# EAGLE board PCB design 2layer (EAGLE 7.5.0)
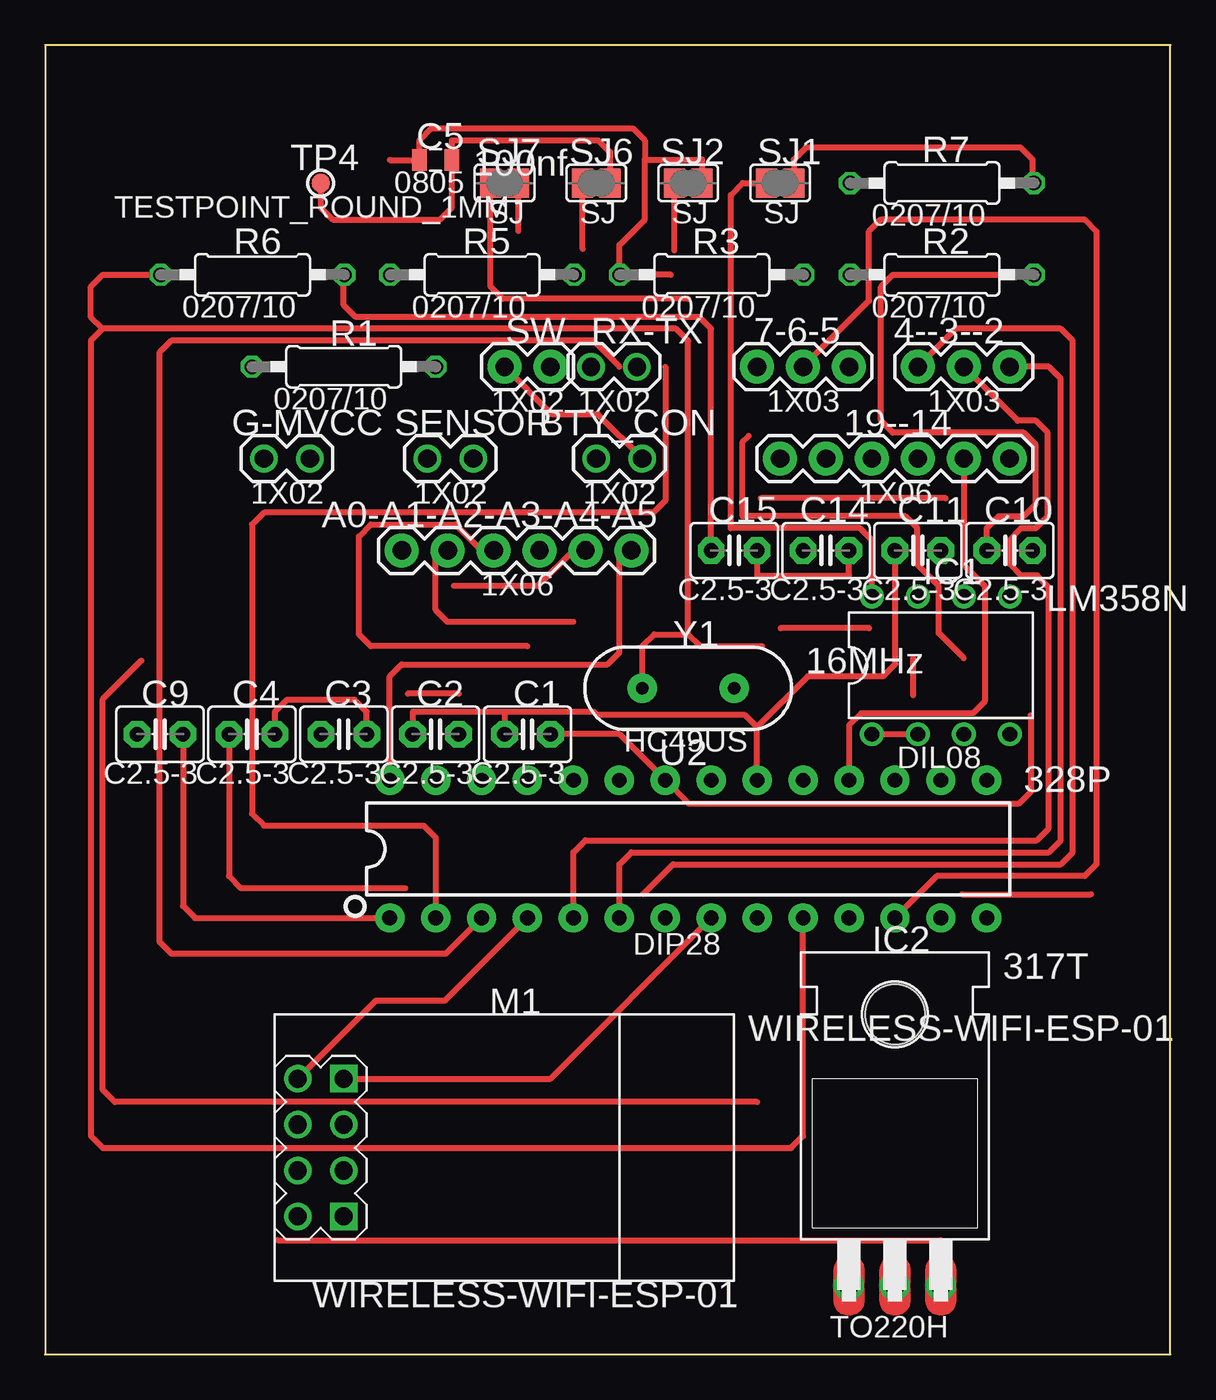
[diagram p0: board, top side]
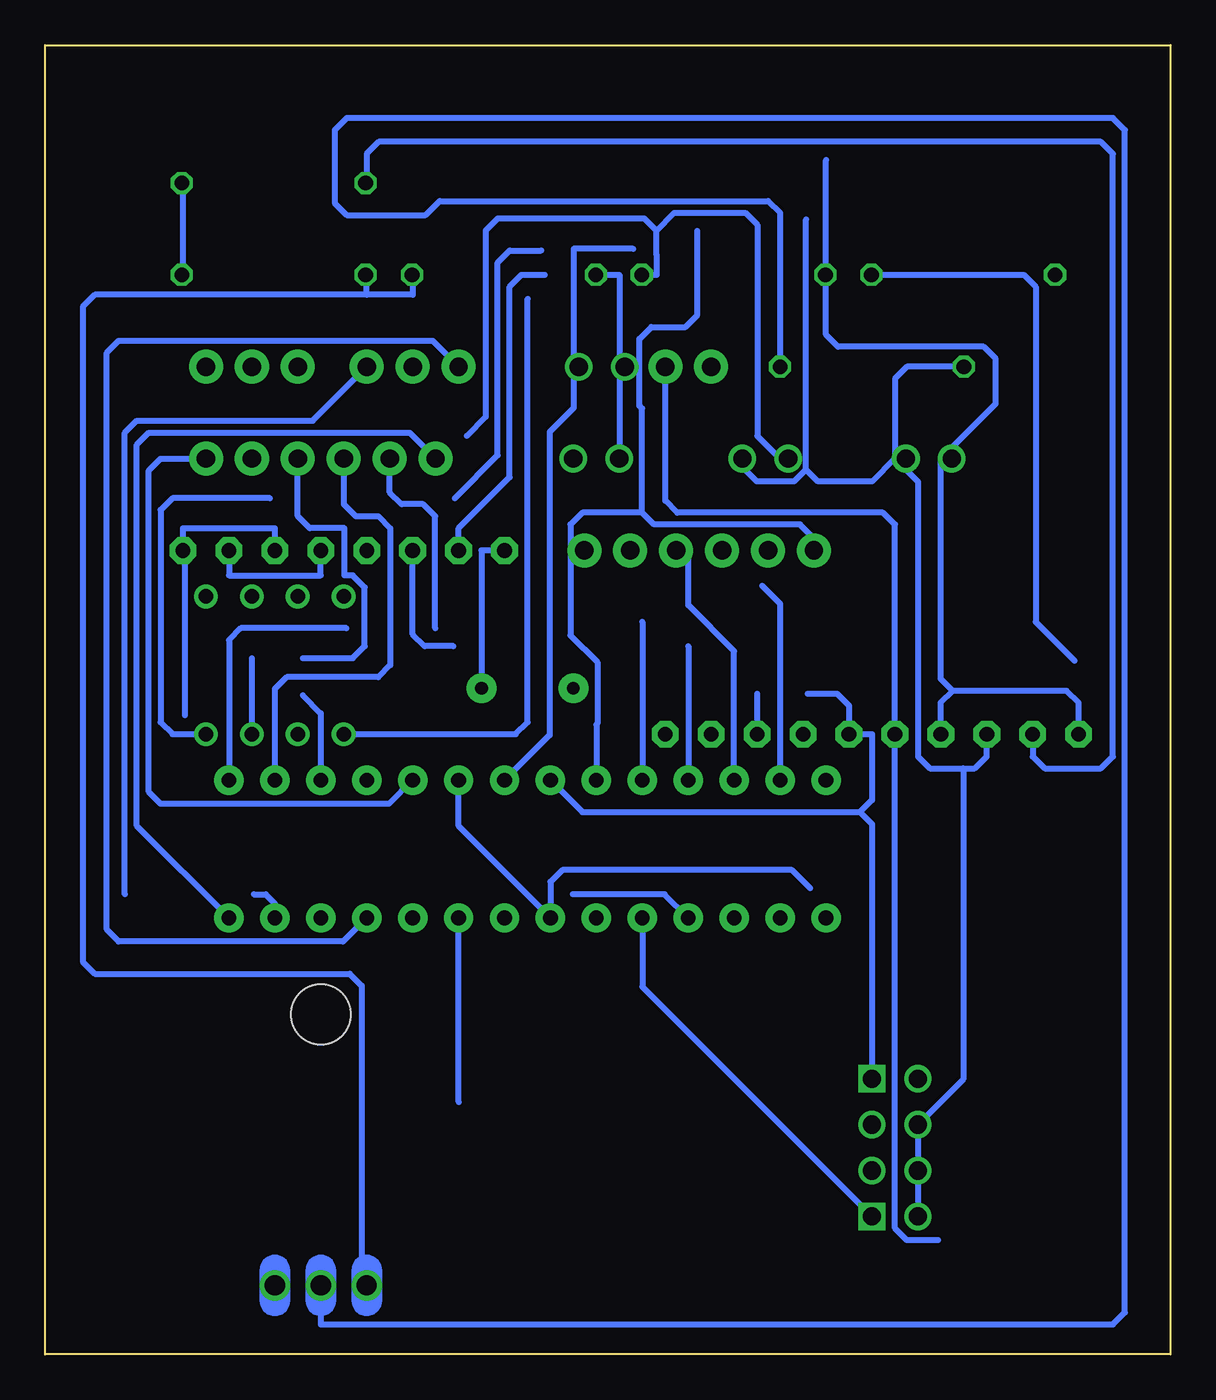
[diagram p1: board, bottom side, seen from below]

Size 62.23 x 72.39 mm. Coordinates in mm from the lower left corner, seen from the top.
Outline: 0,72.39 0,0 62.23,0 62.23,72.39 0,72.39
Copper layers (1*16): Top 0.035mm / dielectric 1.5mm / Bottom 0.035mm
Design rules "default *": minimum track width 10mil, minimum drill 0.61mm, track to track 8mil, track to pad 8mil, pad to pad 8mil, via to via 8mil, smd to smd 8mil, copper to edge 40mil, drill to drill 8mil, minimum pad ring 0mil, minimum via ring 8mil, stop-mask expansion 2mil, vias tented up to drill 19mil, thermal gap 10mil
Net classes: 0 Default: width 0.33 mm, clearance 0.33 mm

## Footprints (pad centres in the part's own frame; a part is rotated, then mirrored left to right if it is on the bottom)
1X03 = drill 1.016 pad 1.88: 1 -2.314,-1.128; 2 0.226,-1.128; 3 2.766,-1.128
1X06 = drill 1.016 pad 1.88: 1 -6.128,-1.128; 2 -3.588,-1.128; 3 -1.048,-1.128; 4 1.492,-1.128; 5 4.032,-1.128; 6 6.572,-1.128
1X02 = drill 1.016 pad 1.524: 1 -2.909,-1.128; 2 -0.369,-1.128
C2.5-3 = drill 0.813 pad 1.478 octagon: 1 -1.27,-0.992; 2 1.27,-0.992
0805 = smd 0.8 x 1.2: 1 -0.839,0.247; 2 0.961,0.247
DIL08 = drill 0.813 pad 1.321: 1 -2.818,-3.81; 2 -0.278,-3.81; 3 2.262,-3.81; 4 4.802,-3.81; 5 4.802,3.81; 6 2.262,3.81; 7 -0.278,3.81; 8 -2.818,3.81
TO220H = drill 1.118 pad 1.676: 1 -2.509,-8.317; 2 0.031,-8.317; 3 2.571,-8.317 | hole 3.302: 0.031,6.669
WIRELESS-WIFI-ESP-01 = drill 1 pad 1.508 square: A1 -8.89,3.742; D1 -8.89,-3.878 | drill 1 pad 1.508: A2 -11.43,3.742; B1 -8.89,1.202; B2 -11.43,1.202; C1 -8.89,-1.338; C2 -11.43,-1.338; D2 -11.43,-3.878
0207/10 = drill 0.813 pad 1.22 octagon: 1 -5.048,-1.055; 2 5.112,-1.055
SJ = smd 1.168 x 1.6: 1 -0.635,-0.928; 2 0.889,-0.928
1X02_SW = drill 1.016 pad 1.88: 1 -1.044,-1.128; 2 1.496,-1.128
TESTPOINT_ROUND_1MM = smd 0.996 x 0.996: P$1 -1.27,-0.014
DIP28 = drill 0.813 pad 1.626: 1 -16.629,-3.81; 2 -14.089,-3.81; 3 -11.549,-3.81; 4 -9.009,-3.81; 5 -6.469,-3.81; 6 -3.929,-3.81; 7 -1.389,-3.81; 8 1.151,-3.81; 9 3.691,-3.81; 10 6.231,-3.81; 11 8.771,-3.81; 12 11.311,-3.81; 13 13.851,-3.81; 14 16.391,-3.81; 15 16.391,3.81; 16 13.851,3.81; 17 11.311,3.81; 18 8.771,3.81; 19 6.231,3.81; 20 3.691,3.81; 21 1.151,3.81; 22 -1.389,3.81; 23 -3.929,3.81; 24 -6.469,3.81; 25 -9.009,3.81; 26 -11.549,3.81; 27 -14.089,3.81; 28 -16.629,3.81
HC49US = drill 0.7 pad 1.651: 1 -2.54,-0.046; 2 2.54,-0.046

## Placement (x,y rotation side)
4--3--2  1X03  [1X03]  50.57,55.74 0 top
7-6-5  1X03  [1X03]  41.68,55.74 0 top
19--14  1X06  [1X06]  46.77,50.66 0 top
A0-A1-A2-A3-A4-A5  1X06  [1X06]  25.85,45.58 0 top
BTY_CON  1X02  [1X02]  33.39,50.66 0 top
C1  C2.5-3  [C2.5-3]  26.67,35.28 0 top
C2  C2.5-3  [C2.5-3]  21.59,35.28 0 top
C3  C2.5-3  [C2.5-3]  16.51,35.28 0 top
C4  C2.5-3  [C2.5-3]  11.43,35.28 0 top
C5  100nf  [0805]  21.53,65.79 0 top
C9  C2.5-3  [C2.5-3]  6.35,35.28 0 top
C10  C2.5-3  [C2.5-3]  53.34,45.44 0 top
C11  C2.5-3  [C2.5-3]  48.26,45.44 0 top
C14  C2.5-3  [C2.5-3]  43.18,45.44 0 top
C15  C2.5-3  [C2.5-3]  38.1,45.44 0 top
G-MVCC  1X02  [1X02]  15,50.66 0 top
IC1  LM358N  [DIL08]  48.54,38.1 0 top
IC2  317T  [TO220H]  46.96,12.13 0 top
M1  WIRELESS-WIFI-ESP-01  [WIRELESS-WIFI-ESP-01]  25.4,11.5 0 top
R1  0207/10  [0207/10]  16.48,55.67 0 top
R2  0207/10  [0207/10]  49.56,60.75 0 top
R3  0207/10  [0207/10]  36.83,60.75 0 top
R5  0207/10  [0207/10]  24.13,60.75 0 top
R6  0207/10  [0207/10]  11.43,60.75 0 top
R7  0207/10  [0207/10]  49.56,65.83 0 top
RX-TX  1X02  [1X02]  33.09,55.74 0 top
SENSOR  1X02  [1X02]  24.04,50.66 0 top
SJ1  SJ  [SJ]  40.51,65.7 0 top
SJ2  SJ  [SJ]  35.43,65.7 0 top
SJ6  SJ  [SJ]  30.35,65.7 0 top
SJ7  SJ  [SJ]  25.27,65.7 0 top
SW  1X02  [1X02_SW]  26.44,55.74 0 top
TP4  TESTPOINT_ROUND_1MM  [TESTPOINT_ROUND_1MM]  16.51,64.78 0 top
U2  328P  [DIP28]  35.68,27.94 0 top
Y1  16MHz  [HC49US]  35.56,36.88 0 top

## Library data of the parts
4--3--2 7-6-5 19--14 A0-A1-A2-A3-A4-A5 BTY_CON C1-C5 C9-C11 C14 C15 G-MVCC IC1 IC2 M1 R1-R3 R5-R7 RX-TX SENSOR SJ1 SJ2 SJ6 SJ7 SW TP4 U2 Y1 = common

## Nets
0/RX: RX-TX.2 U2.2
1/TX: RX-TX.1 U2.3
2: 4--3--2.1 M1.A2 U2.4
3: 4--3--2.2 M1.D1 U2.5
4: 4--3--2.3 U2.6
5/B: 7-6-5.1 U2.11
6: 7-6-5.2 U2.12
7/C: 7-6-5.3 U2.13
8: 19--14.1 U2.14
9/A: 19--14.2 U2.15
10/SS: 19--14.3 U2.16
11/MOSI: 19--14.4 U2.17
12/MISO: 19--14.5 U2.18
13/SCK: 19--14.6 U2.19
A0: A0-A1-A2-A3-A4-A5.1 SJ7.2 U2.23
A1: A0-A1-A2-A3-A4-A5.2 U2.24
A2/TEM: A0-A1-A2-A3-A4-A5.3 U2.25
A3: A0-A1-A2-A3-A4-A5.4 U2.26
A4/SDA: A0-A1-A2-A3-A4-A5.5 U2.27
A5/SCL: A0-A1-A2-A3-A4-A5.6 U2.28
GND: BTY_CON.1 C1.2 C2.2 C3.2 C4.2 C5.1 C9.1 C10.2 C11.2 C14.2 C15.2 G-MVCC.1 M1.A1 R3.1 R5.1 SJ2.2 U2.8 U2.22
M_VCC: C1.1 C2.1 C4.1 C5.2 C10.1 C11.1 G-MVCC.2 M1.B2 M1.C2 M1.D2 R1.1 R2.2 R7.2 SENSOR.2 SJ1.2 SJ6.2 TP4.P$1 U2.7 U2.20
N$1: BTY_CON.2 SW.1
N$2: IC1.3 R5.2 SENSOR.1
N$3: IC2.2 R1.2
N$6: IC2.1 R2.1 R3.2
N$12: C9.2 R7.1 U2.1
N$14: SJ6.1 U2.21
N$19: IC1.1 IC1.2 SJ7.1
N$28: C15.1 R6.2 U2.9 Y1.2
N$29: C14.1 R6.1 U2.10 Y1.1
V+: IC1.8 SJ1.1
V-: IC1.4 SJ2.1
VBAT: C3.1 IC2.3 SW.2

## Tracks (layer width: path | path; a pad name or v marks a point on that pad's centre or on a via)
0/RX
  Top 0.33: 34.29,54.61 34.29,47.21 33.63,46.55 12.1,46.55 11.44,45.89 11.44,29.89 12.1,29.23 20.93,29.23 21.59,28.57 U2.2
1/TX
  Top 0.33: 31.75,54.61 30.31,56.05 6.97,56.05 6.31,55.39 6.31,22.82 6.97,22.16 22.16,22.16 U2.3
2
  Top 0.33: U2.4 22.09,19.55 18.28,19.55 M1.A2 | 33.06,25.44 34.72,27.1 56.16,27.1 56.82,27.76 56.82,56.05 56.16,56.71 50.35,56.71 4--3--2.1
  Bottom 0.33: U2.4 27.98,25.44 33.06,25.44
3
  Top 0.33: U2.5 29.21,27.76 29.87,28.42 54.84,28.42 55.5,29.08 55.5,42.41 54.84,43.07 53.96,43.07 53.3,43.73 53.3,45.02 53.96,45.68 54.77,45.68 55.44,46.34 55.44,50.97 54.77,51.62 53.78,51.62 4--3--2.2
  Bottom 0.33: U2.5 29.21,20.32 M1.D1
4
  Top 0.33: U2.6 31.75,27.1 32.41,27.76 55.5,27.76 56.16,28.42 56.16,53.95 55.5,54.61 4--3--2.3
5/B
  Bottom 0.33: U2.11 45.76,22.82 58.17,22.82 58.83,23.48 58.83,55.39 58.17,56.05 40.8,56.05 7-6-5.1
6
  Top 0.33: 7-6-5.2 45.55,58.26 45.55,62.1 46.22,62.76 57.48,62.76 58.14,62.1 58.14,27.1 57.48,26.44 49.3,26.44 U2.12
7/C
  Top 0.33: 50.7,25.44 57.82,25.44
  Bottom 0.33: 57.82,25.44 57.82,50.97 57.16,51.62 47.44,51.62 7-6-5.3 | 50.7,25.44 50.04,25.44 49.53,24.93 U2.13 | U2.13
8
  Bottom 0.33: U2.14 57.16,29.22 57.16,50.3 56.5,50.97 42.08,50.97 19--14.1
9/A
  Top 0.33: 45.57,40.16 40.67,40.16
  Bottom 0.33: 40.67,40.16 40.67,46.34 41.33,47 42.52,47 43.18,47.66 19--14.2 | 45.57,40.16 51.41,40.16 52.07,39.5 U2.15
10/SS
  Bottom 0.33: 19--14.3 45.72,47 45.06,46.34 43.8,46.34 43.14,45.68 43.14,38.11 43.8,37.45 48.87,37.45 49.53,36.79 U2.16
11/MOSI
  Top 0.33: 47.99,38.49 47.99,36.45
  Bottom 0.33: 47.99,36.45 46.99,35.45 U2.17 | 47.99,38.49 45.22,38.49 44.56,39.15 44.56,42.41 45.22,43.07 45.68,43.07 45.68,45.68 47.6,45.68 48.26,46.34 19--14.4
12/MISO
  Top 0.33: 19--14.5 50.8,43.64 51.95,42.49 51.95,36.11 51.3,35.45 45.11,35.45 44.45,34.79 U2.18
13/SCK
  Bottom 0.33: U2.19 43.22,30.44 55.84,30.44 56.5,31.1 56.5,48.87 55.84,49.53 19--14.6
A0
  Top 0.33: 26.16,62.12 SJ7.2
  Bottom 0.33: 19.05,44.45 20.48,45.89 28.56,45.89 29.22,46.55 | 29.22,46.55 32.52,46.55 33.18,45.89 33.18,39.76 31.7,38.27 31.7,34.88 31.75,34.82 U2.23 | 29.22,46.55 29.22,52.31 29.38,52.46 29.38,56.15 28.71,56.81 26.82,56.81 26.16,57.47 26.16,62.12
A1
  Top 0.33: 29.21,40.5 22.25,40.5 21.59,41.16 21.59,44.45
  Bottom 0.33: 29.21,40.5 U2.24
A2/TEM
  Top 0.33: 26.67,39.15 18.01,39.15 17.35,39.81 17.35,45.23 18.01,45.89 22.7,45.89 24.13,44.45
  Bottom 0.33: 26.67,39.15 U2.25
A3
  Bottom 0.33: U2.26 24.13,38.89 26.67,41.43 26.67,44.45
A4/SDA
  Top 0.33: 22.59,42.51 27.27,42.51 29.21,44.45
  Bottom 0.33: 22.59,42.51 21.59,41.5 U2.27
A5/SCL
  Top 0.33: U2.28 19.05,37.49 19.71,38.15 31.09,38.15 31.75,38.81 31.75,44.45
GND
  Top 0.33: M1.A1 27.94,15.24 U2.8 | 54.49,35.35 54.49,31.1 53.84,30.44 35.6,30.44 U2.22 31.75,34.29 C1.2 | 19.05,66.04 C5.1 20.69,67.13 21.35,67.8 32.5,67.8 33.16,67.13 33.16,66.06 | C3.2 17.78,35.52 17.12,36.18 13.36,36.18 12.7,35.52 C4.2 | C15.2 39.37,43.07 44.45,43.07 C14.2 | 34.59,59.69 31.75,59.69 31.75,61.34 33.16,62.74 33.16,66.06 | 22.86,36.53 20.05,36.53 | 33.16,66.06 36.32,66.06 SJ2.2
  Bottom 0.33: C9.1 5.08,36.03 5.74,36.69 12.04,36.69 | 12.04,36.69 12.7,37.35 12.7,49.53 9.66,52.57 9.66,55.05 10.32,55.72 18.39,55.72 19.05,56.38 19.05,59.69 19.05,66.04 | 31.75,59.69 30.48,59.69 BTY_CON.1 | 20.05,36.53 18.44,36.53 17.78,35.87 C3.2 16.51,34.29 16.51,30.64 17.17,29.98 | 54.49,35.35 54.49,44.45 C10.2 | C4.2 12.7,36.03 12.04,36.69 | 22.86,36.53 C2.2 | 17.17,29.98 16.51,29.32 M1.A1 | C15.2 39.37,45.68 36.55,48.5 36.55,59.03 35.89,59.69 34.59,59.69 | U2.22 32.52,29.98 17.17,29.98 | C10.2 54.61,45.68 49.53,45.68 C11.2 | C10.2
M_VCC
  Top 0.33: C11.1 46.99,38.15 46.33,37.49 42.17,37.49 39.37,34.69 | 39.37,34.69 38.71,35.35 30.52,35.35 30.34,35.52 25.4,35.52 | 25.4,35.52 20.32,35.52 C2.1 | C10.1 52.07,45.68 52.73,46.34 54.11,46.34 54.77,47 54.77,50.3 54.11,50.97 46.88,50.97 46.22,51.62 46.22,59.03 46.88,59.69 54.61,59.69 | TP4.P$1 15.24,63.41 15.9,62.75 20.16,62.75 21.83,62.75 22.49,63.41 C5.2 22.49,67.13 30.58,67.13 31.24,66.47 SJ6.2 | 25.4,35.52 C1.1 | 54.61,64.77 54.61,66.06 53.95,66.72 42.06,66.72 41.4,66.06 SJ1.2 | C4.1 10.16,26.44 10.82,25.78 19.93,25.78 | U2.20 39.37,34.69
  Bottom 0.33: R1.1 14.58,54.61 15.24,53.95 15.24,49.53 | 19.93,25.78 20.93,26.78 33.63,26.78 34.29,26.12 U2.7 39.37,29.21 U2.20 | 15.24,49.53 16.5,48.27 19.49,48.27 20.16,48.93 | 20.16,48.93 20.81,48.27 22.87,48.27 24.13,49.53 | 20.16,48.93 20.16,62.75 | 15.24,49.53 13.96,48.25 13.96,33.06 13.3,32.4 11.47,32.4 | 11.47,32.4 10.82,32.4 10.16,33.06 C4.1 | 54.61,59.69 54.61,64.77 | C10.1 52.07,43.07 46.99,43.07 C11.1 | 11.47,32.4 11.47,15.2 M1.B2 M1.C2 M1.D2
N$1
  Top 0.33: BTY_CON.2 30.58,51.97 28.04,51.97 SW.1
N$2
  Top 0.33: 50.8,38.49 49.41,39.88 49.41,42.47 48.22,43.66 48.22,45.68 47.56,46.34 38.57,46.34 38.57,50.44 38.91,50.79 | 38.91,50.79
  Bottom 0.33: 29.21,59.69 28.41,59.69 28.41,60.8 28.43,60.82 28.43,62.14 | 28.43,62.14 27.46,63.12 23.51,63.12 22.85,62.46 22.85,50.79 21.59,49.53 | 28.43,62.14 29.09,62.8 37.21,62.8 37.87,62.14 37.87,51.83 38.91,50.79 | 50.8,38.49 IC1.3
N$3
  Bottom 0.33: IC2.2 46.99,1.65 3.19,1.65 2.53,2.31 2.53,67.7 3.19,68.36 45.55,68.36 46.22,67.7 46.22,63.67 45.55,63.01 41.19,63.01 40.42,63.78 22.25,63.78 21.59,63.12 R1.2
N$6
  Bottom 0.33: 41.91,59.69 41.91,58.59 44.45,58.59 | 44.45,58.59 59.49,58.59 60.15,57.93 60.15,21.7 59.49,21.04 45.39,21.04 44.73,20.38 44.73,3.81 IC2.1 | 44.45,58.59 44.45,59.69 | IC2.1
N$12
  Top 0.33: C9.2 7.62,24.79 8.28,24.13 U2.1
  Bottom 0.33: C9.2 7.62,33.06 6.96,32.4 3.85,32.4 3.19,33.06 3.19,66.38 3.85,67.04 43.79,67.04 44.45,66.38 44.45,64.77
N$14
  Top 0.33: 29.72,61.14 SJ6.1
  Bottom 0.33: 29.72,61.14 33.01,61.14 33.01,52.33 34.34,51 34.34,34.24 U2.21
N$19
  Top 0.33: 35.55,58.37 25.3,58.37 24.64,59.03 SJ7.1 | IC1.1 IC1.2
  Bottom 0.33: IC1.1 36.21,34.29 35.55,34.95 35.55,58.37
N$28
  Top 0.33: C15.1 36.83,56.71 36.17,57.37 17.17,57.37 16.51,58.03 16.51,59.69 | 39.37,13.95 3.85,13.95 3.19,14.61 3.19,36.23 5.31,38.36
  Bottom 0.33: 16.51,59.69 8.11,59.69 7.45,59.03 7.45,40.5 5.31,38.36 | 39.37,13.95 U2.9 | C15.1 38.1,44.45 Y1.2
N$29
  Top 0.33: Y1.1 33.02,39.15 33.68,39.81 35.55,39.81 | 35.55,39.81 35.55,56.05 34.89,56.71 3.19,56.71 | 3.19,56.71 2.53,56.05 2.53,12.07 3.19,11.41 41.25,11.41 41.91,12.07 U2.10 | 3.19,56.71 2.53,57.37 2.53,59.03 3.19,59.69 6.35,59.69 | 35.55,39.81 36.21,39.15 39.65,39.15
  Bottom 0.33: 39.65,39.15 41.25,39.15 41.91,39.81 C14.1
V+
  Top 0.33: IC1.8 45.72,45.02 45.06,45.68 37.91,45.68 37.91,64.11 38.57,64.77 SJ1.1
V-
  Top 0.33: 34.8,61.04 SJ2.1 | 49.8,47.35 39.58,47.35
  Bottom 0.33: 39.58,47.35 37.21,49.71 37.21,60.38 36.55,61.04 34.8,61.04 | 49.8,47.35 55.18,47.35 55.84,46.69 55.84,34.95 55.18,34.29 IC1.4
VBAT
  Top 0.33: 12.84,6.31 49.53,6.31 IC2.3
  Bottom 0.33: 12.84,6.31 14.58,6.31 15.24,6.97 C3.1 15.24,45.89 15.9,46.55 27.28,46.55 27.94,47.21 SW.2

## Text on the board
tPlace: C5 | 100nf | SJ7 | SJ6 | SJ2 | SJ1 | R7 | TP4 | R6 | R5 | R3 | R2 | SW | RX-TX | 7-6-5 | 4--3--2 | R1 | G-MVCC | SENSOR | BTY_CON | 19--14 | C15 | C14 | C11 | C10 | A0-A1-A2-A3-A4-A5 | IC1 | LM358N | Y1 | 16MHz | C9 | C4 | C3 | C2 | C1 | U2 | 328P | IC2 | 317T | M1 | WIRELESS-WIFI-ESP-01 | WIRELESS-WIFI-ESP-01
tDocu: C5 | 100nf | SJ7 | SJ6 | SJ2 | SJ1 | R7 | TP4 | R6 | R5 | R3 | R2 | SW | RX-TX | 7-6-5 | 4--3--2 | R1 | G-MVCC | SENSOR | BTY_CON | 19--14 | C15 | C14 | C11 | C10 | A0-A1-A2-A3-A4-A5 | IC1 | LM358N | Y1 | 16MHz | C9 | C4 | C3 | C2 | C1 | U2 | 328P | IC2 | 317T | M1 | WIRELESS-WIFI-ESP-01 | WIRELESS-WIFI-ESP-01